# Altium PCB Slot.PcbDoc
Units mil, origin at the board's own origin, x right, y up, seen from the top; angles counter-clockwise.
Board outline 2745 x 3360 mil, 2 copper layers (Top Layer, Bottom Layer); 39 components, 46 nets, 163 pads, 11 vias.
Unrouted connection lines stored in the file: 11.
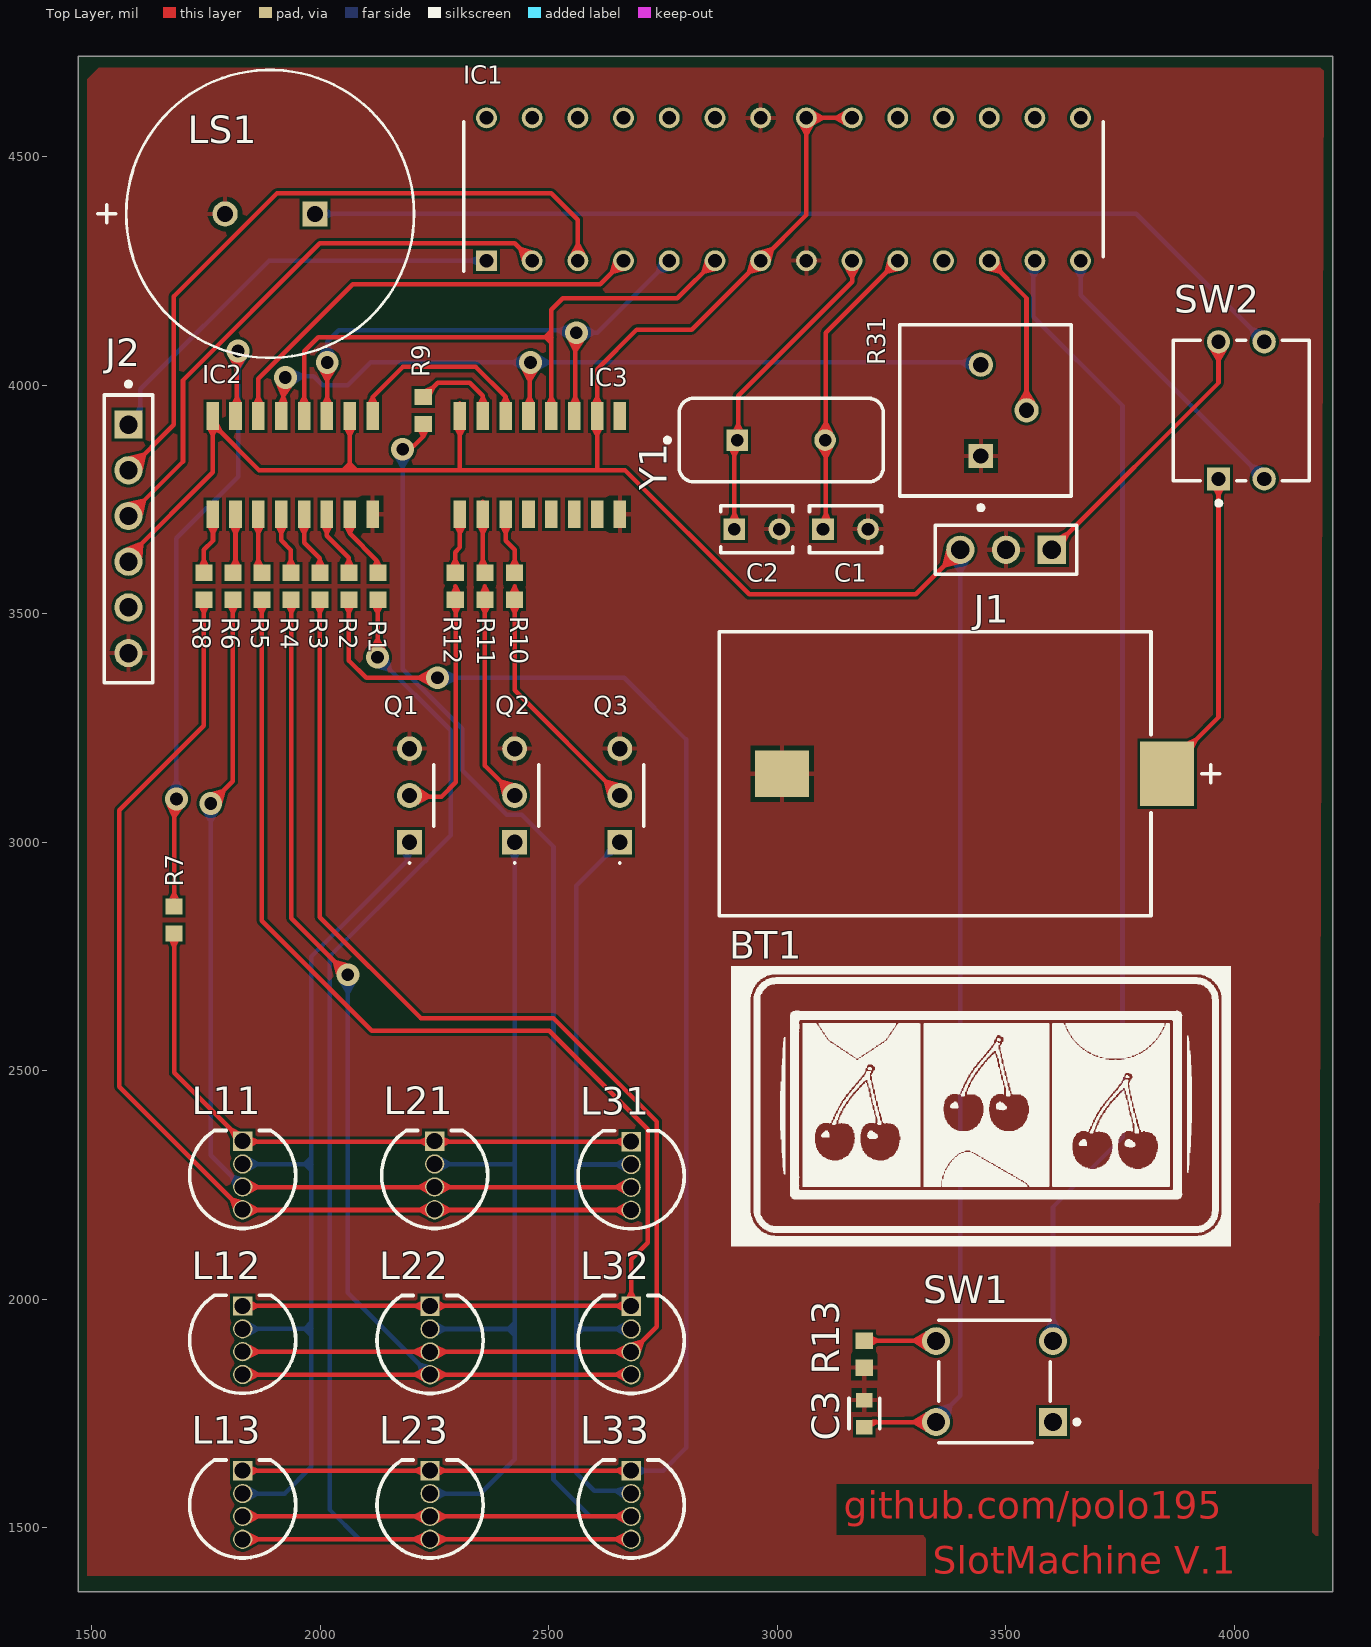
[diagram p0: Top Layer view]
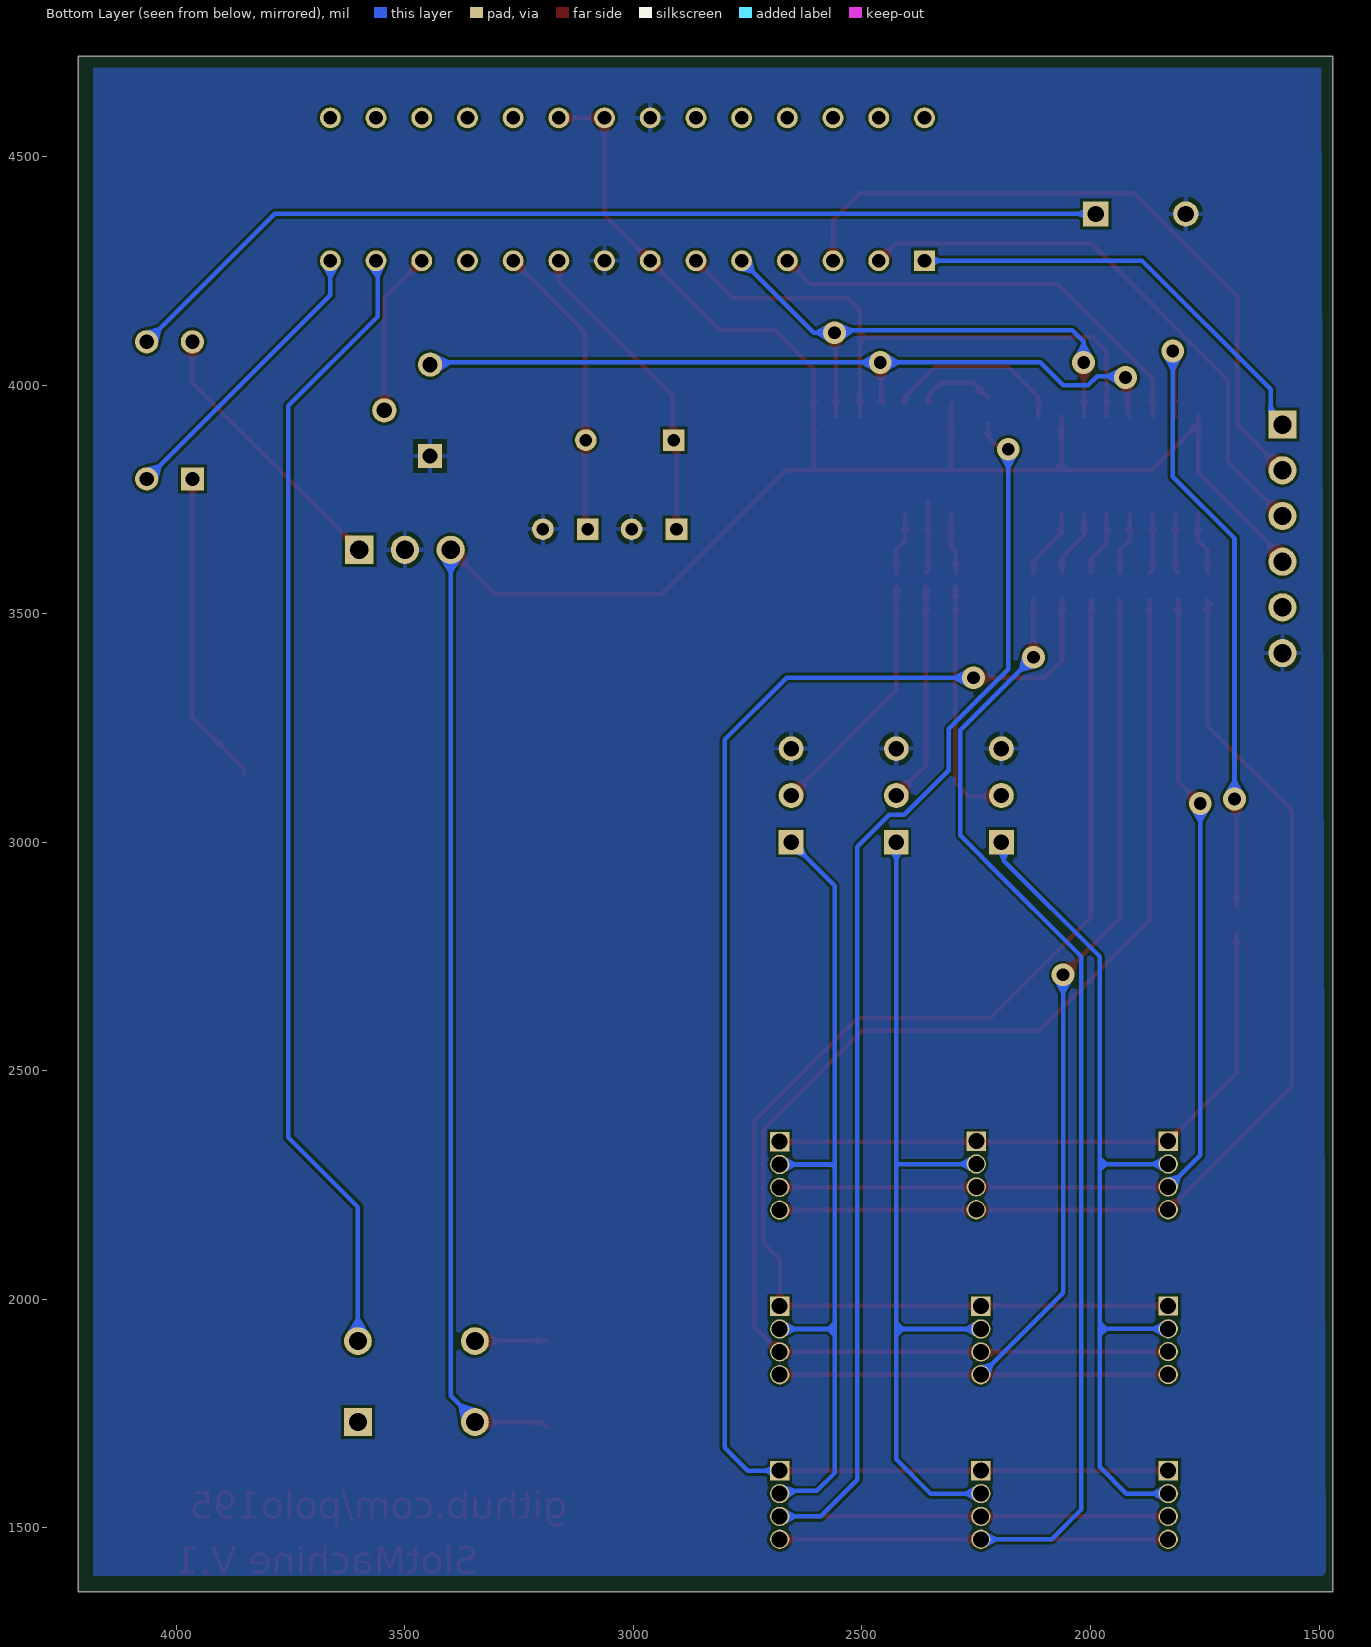
[diagram p1: Bottom Layer view, seen from below]
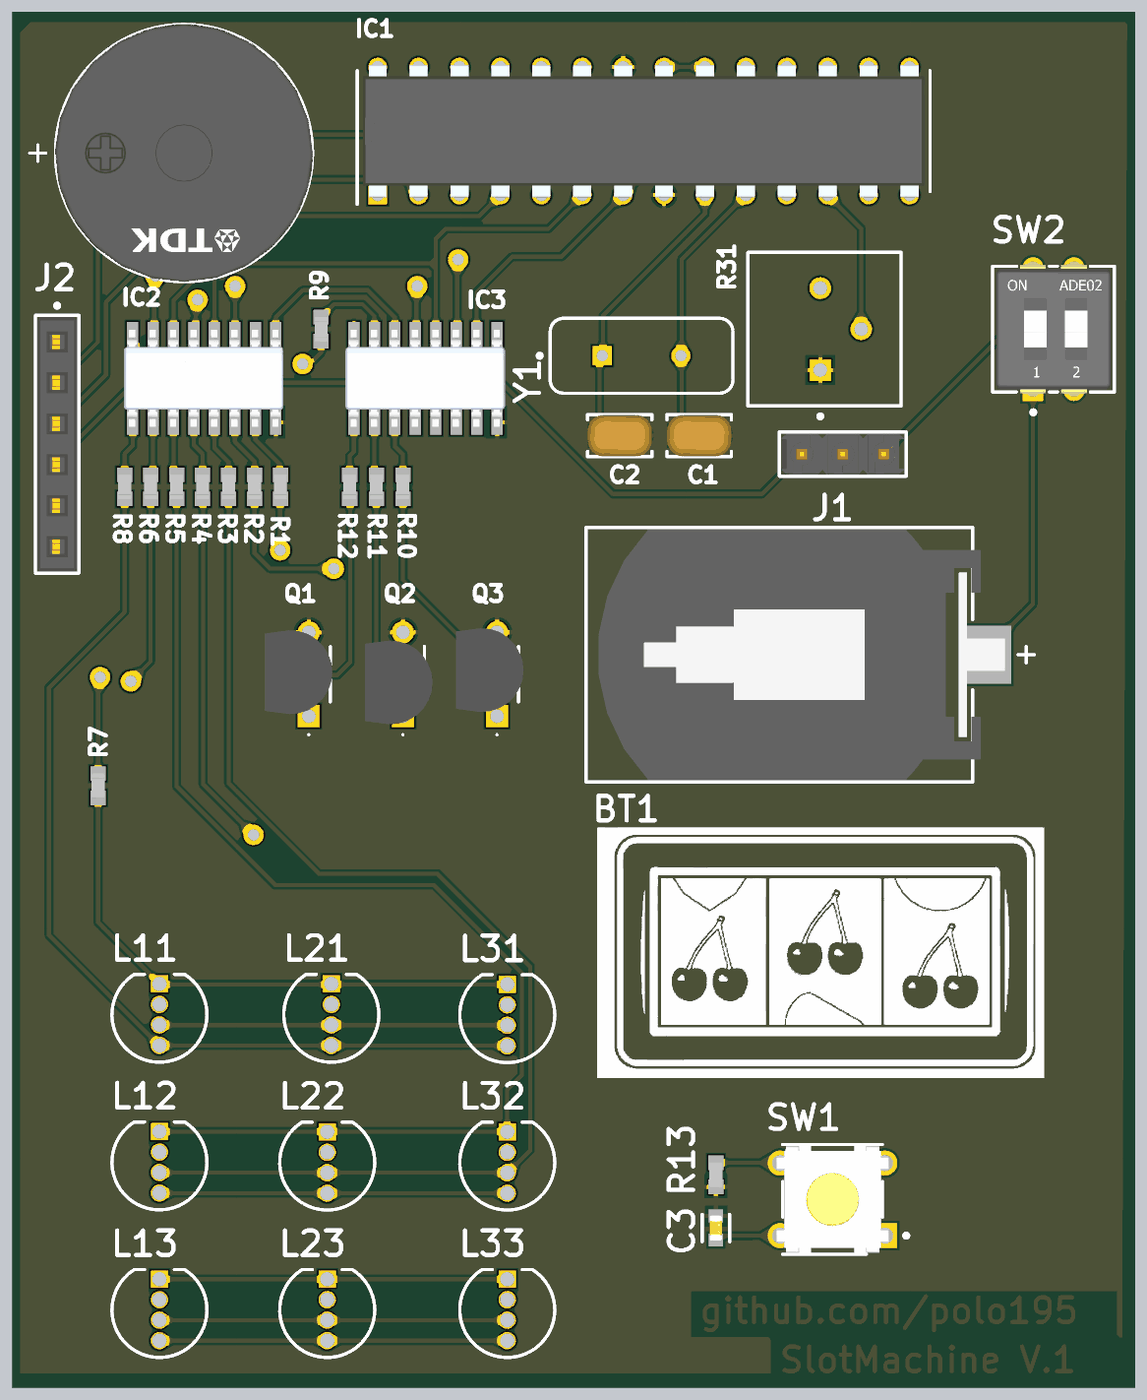
[diagram p2: 3D render of the assembled board from above, using the file's embedded part models]

## Layer stack, top to bottom
Top Solder: solder mask 0.4, Solder Resist, Dk 3.5
Top Layer: signal copper 1.4
Dielectric 1: dielectric 12.6, FR-4, Dk 4.8
Bottom Layer: signal copper 1.4
Bottom Solder: solder mask 0.4, Solder Resist, Dk 3.5

## Board outline
1470,1360 4215,1360 4215,4720 1470,4720

## Design rules (kind name [scope] priority, off if disabled: settings)
Clearance Clearance_1 [All] p1: gap=6 ignorepadtopadclearanceinfootprint=FALSE
PolygonConnect [All] p1: connectstyle=Relief reliefconductorwidth=10 reliefentries=4 polygonreliefangle="90 Angle" airgapwidth=10
RoutingVias [All] p1: holewidth=28 width=50 viastyle="Through Hole" minholewidth=28 minwidth=50 maxholewidth=28 maxwidth=50
SolderMaskExpansion [All] p1: expansion=4 istentingtop=FALSE
SupplyNets "Schematic Supply Nets_2" [InNet('VCC')] p1: voltage=0.000
SupplyNets "Schematic Supply Nets_1" [InNet('GND')] p2: voltage=0.000
SupplyNets "Schematic Supply Nets" [InNet('+5')] p3: voltage=0.000
Width [All] p1: maxlimit=10 minlimit=10 preferedwidth=10
30 further rules are at their usual default settings.

## Components (designator, comment, footprint, x,y, rotation, side; value= is the part's Value field where it differs from the comment)
BT1 "S8421-45R" FP-S8421-45R-MFG 3345,3150 r90 top
C1 "22pF" FP-K221K15X7RF5TL2-MFG 3148.97,3685 r0 top
C2 "22pF" FP-K221K15X7RF5TL2-MFG 2955,3685 r0 top
C3 "CC0603MRX7R7BB224" FP-CC0603-DA-MFG 3190,1750 r90 top value="220 nF"
IC1 "ATMEGA_328PU" DIP794W56P254L3486H508Q28N 3013.28,4428.74 r90 top
IC2 "74HCT595D,118" SOIC127P600X175-16N 1939.25,3825 r90 top
IC3 "74HCT595D,118" SOIC127P600X175-16N 2480.32,3825 r90 top
J1 "22-28-4035" FP-22-28-4035-MFG 3500,3640 r180 top
J2 "2212S-06SG-85" FP-2212S-06SG-85-MFG 1580,3663.93 r270 top
L11 "WP154A4SUREQBFZGC" KING-WP154A4SUREQBFZGC_V 1830,2271 r0 top
L12 "WP154A4SUREQBFZGC" KING-WP154A4SUREQBFZGC_V 1830,1910.5 r0 top
L13 "WP154A4SUREQBFZGC" KING-WP154A4SUREQBFZGC_V 1830,1550 r0 top
L21 "WP154A4SUREQBFZGC" KING-WP154A4SUREQBFZGC_V 2250,2271 r0 top
L22 "WP154A4SUREQBFZGC" KING-WP154A4SUREQBFZGC_V 2240,1910 r0 top
L23 "WP154A4SUREQBFZGC" KING-WP154A4SUREQBFZGC_V 2240,1550 r0 top
L31 "WP154A4SUREQBFZGC" KING-WP154A4SUREQBFZGC_V 2680,2270 r0 top
L32 "WP154A4SUREQBFZGC" KING-WP154A4SUREQBFZGC_V 2680,1910 r0 top
L33 "WP154A4SUREQBFZGC" KING-WP154A4SUREQBFZGC_V 2680,1550 r0 top
LS1 "SD1614T5-A1" FP-SD1614T5-A1-MFG 1890,4375 r180 top
Q1 "BC547BZL1G" BC547BZL1G 2195,3000 r90 top
Q2 "BC547BZL1G" BC547BZL1G 2425,3000 r90 top
Q3 "BC547BZL1G" BC547BZL1G 2655,3000 r90 top
R1 "560" RESC1608X55N 2125.82,3560 r270 top
R2 "560" RESC1608X55N 2062.35,3560 r270 top
R3 "560" RESC1608X55N 1998.88,3560 r270 top
R4 "560" RESC1608X55N 1935.41,3560 r270 top
R5 "560" RESC1608X55N 1871.94,3560 r270 top
R6 "560" RESC1608X55N 1808.47,3560 r270 top
R7 "560" RESC1608X55N 1680,2830 r90 top
R8 "560" RESC1608X55N 1745,3560 r270 top
R9 "560" RESC1608X55N 2225,3945 r90 top
R10 "1k" RESC1608X55N 2425,3560 r270 top
R11 "1k" RESC1608X55N 2360,3560 r270 top
R12 "1k" RESC1608X55N 2295,3560 r270 top
R13 "1k" RESC1608X55N 3190,1880 r270 top
R31 "M63P103KB30T607" VISH-M63P103KB30T607 3455.24,3945 r90 top
SW1 "B3W-1022" FP-B3W-1022-MFG 3475,1820 r0 top
SW2 "1825057-1" FP-1825057-1-MFG 4015,3945 r0 top
Y1 "FOXSLF/160-20" FOX-FOXSLF160-20 3008.22,3880 r0 top

## Footprints (in the part's own frame and the unit in brackets; to place one, negate y for a bottom-side part, rotate by r counter-clockwise, add the part's x,y. Pads: shape width x height; smd on the part's side, far side on the other; paste and mask are expansions set on the pad)
BC547BZL1G [mm]
  rect 1.381x1.381 hole 0.85: 1(0,0)
  round 1.381 hole 0.85: 2(2.6,0) 3(5.2,0)
  silkscreen extent -1.2,-1.34 4.32,0.05, body extent 0.13,-1.46 5.33,2.73, height 8.33
DIP794W56P254L3486H508Q28N [mil]
  rect 45.63x45.63 hole 29.88: 1(-156.26,650)
  round 45.63 hole 29.88: 2(-156.26,550) 3(-156.26,450) 4(-156.26,350) 5(-156.26,250) 6(-156.26,150) 7(-156.26,50) 8(-156.26,-50) 9(-156.26,-150) 10(-156.26,-250) 11(-156.26,-350) 12(-156.26,-450) 13(-156.26,-550) 14(-156.26,-650) 15(156.26,-650) 16(156.26,-550) 17(156.26,-450) 18(156.26,-350) 19(156.26,-250) 20(156.26,-150) 21(156.26,-50) 22(156.26,50) 23(156.26,150) 24(156.26,250) 25(156.26,350) 26(156.26,450) 27(156.26,550) 28(156.26,650)
  silkscreen extent -179,-700 147,700, body extent -162,-686 162,686, height 200
FOX-FOXSLF160-20 [mm] "THD, 2-Leads, Body 11.35x4.65mm"
  rect 1.2x1.2 hole 0.7: 1(-2.44,0)
  round 1.2 hole 0.7: 2(2.44,0)
  silkscreen extent -6.45,-2.32 5.68,2.32, body extent -5.67,-2.32 5.68,2.33, height 3.6
FP-22-28-4035-MFG [mm]
  rect 1.57x1.57 hole 1.02 paste-2539.97 mask+0: 1(-2.54,0)
  round 1.57 hole 1.02 paste-2539.97 mask+0: 2(0,0) 3(2.54,0)
  silkscreen extent -3.94,-1.37 3.94,1.37, body extent -4.04,-1.47 4.04,1.47, height 0.25
FP-2212S-06SG-85-MFG [mm]
  rect 1.57x1.57 hole 1.02 paste-2539.97 mask+0: 1(-6.35,0)
  round 1.57 hole 1.02 paste-2539.97 mask+0: 2(-3.81,0) 3(-1.27,0) 4(1.27,0) 5(3.81,0) 6(6.35,0)
  silkscreen extent -8.72,-1.35 8,1.35, body extent -8.1,-1.45 8.1,1.45, height 0.25
FP-1825057-1-MFG [mm]
  rect 1.29x1.29 hole 0.79 paste-2539.97 mask+0: 1(-1.27,-3.81)
  round 1.29 hole 0.79 paste-2539.97 mask+0: 2(1.27,-3.81) 3(1.27,3.81) 4(-1.27,3.81)
  silkscreen extent -3.78,-5.28 3.78,3.9, body extent -3.88,-4.55 3.88,4.55, height 0.25
FP-B3W-1022-MFG [mm]
  rect 1.55x1.55 hole 1 paste-2539.97 mask+0: 1(3.25,-2.25)
  round 1.55 hole 1 paste-2539.97 mask+0: 2(-3.25,-2.25) 3(3.25,2.25) 4(-3.25,2.25)
  silkscreen extent -3.1,-3.4 4.7,3.4, body extent -4.13,-3.5 4.13,3.5, height 0.25
FP-CC0603-DA-MFG [mm]
  rect 0.8x0.9 smd paste+0 mask+0: 1(-0.75,0) 2(0.75,0)
  silkscreen extent -0.85,-0.85 0.85,0.85, body extent -1.35,-0.75 1.35,0.75, height 0.25
FP-K221K15X7RF5TL2-MFG [mm]
  rect 1.2x1.2 hole 0.7 paste-2539.97 mask+0: 1(-1.25,0)
  round 1.2 hole 0.7 paste-2539.97 mask+0: 2(1.25,0)
  silkscreen extent -2,-1.3 2,1.3, body extent -2.1,-1.4 2.1,1.4, height 0.25
FP-S8421-45R-MFG [mm]
  rect 2.6x3 smd paste+0 mask+0: 1(0,8.5)
  rect 3.6x3 smd paste+0 mask+0: 2(0,-12.9)
  silkscreen extent -7.9,-15.83 7.9,12, body extent -8,-14.5 8,12.09, height 0.25
FP-SD1614T5-A1-MFG [mm]
  rect 1.4x1.4 hole 0.9 paste-2539.97 mask+0: 1(-2.5,0)
  round 1.4 hole 0.9 paste-2539.97 mask+0: 2(2.5,0)
  silkscreen extent -8,-8 9.57,8, body extent -8.1,-8.1 8.1,8.1, height 0.25
KING-WP154A4SUREQBFZGC_V [mm] "THD, 4-Leads, Dia 5.9mm, Pitch 1.27mm"
  rect 1.07x1.07 hole 0.889 paste-2539.97: 1(0,1.905)
  round 1.07 hole 0.889 paste-2539.97: 2(0,0.635) 3(0,-0.635) 4(0,-1.905)
  silkscreen extent -2.95,-2.95 2.95,2.5
RESC1608X55N [mm]
  rect 0.9x0.95 smd: 1(-0.75,0) 2(0.75,0)
  body extent -0.77,-0.4 0.77,0.4, height 0.46
SOIC127P600X175-16N [mm]
  rect 1.55x0.7 smd: 1(-2.725,4.445) 2(-2.725,3.175) 3(-2.725,1.905) 4(-2.725,0.635) 5(-2.725,-0.635) 6(-2.725,-1.905) 7(-2.725,-3.175) 8(-2.725,-4.445) 9(2.725,-4.445) 10(2.725,-3.175) 11(2.725,-1.905) 12(2.725,-0.635) 13(2.725,0.635) 14(2.725,1.905) 15(2.725,3.175) 16(2.725,4.445)
  body extent -3,-4.93 3,4.97, height 1.56
VISH-M63P103KB30T607 [mm] "THD, 3-Leads, Body 9.52x9.52mm, Pitch 2.54mm"
  rect 1.35x1.35 hole 0.85: 1(-2.54,0.26)
  round 1.35 hole 0.85: 2(0,-2.28) 3(2.54,0.26)
  silkscreen extent -5.53,-4.76 4.76,4.76, body extent -4.76,-4.76 4.76,4.76, height 10.91

## Part data
BT1: library part CMP-2000-07028-3, "BATTERY HOLDER COIN 20MM SMD", Case/Package=SMD/SMT, Max Operating Temperature=105°C, Min Operating Temperature=-40°C, Package Quantity=500, Contact Plating=Bronze, Material=Polyphenylene, Mount="Surface Mount", Number of Batteries=1, Number of Cells=1, Packaging="Tape and Reel", REACH SVHC="No SVHC", Termination=SMD/SMT
C1 C2: library part CMP-00030-39474895-1, "K221K15X7RF5TL2 Multilayer Ceramic Capacitor, 220 pF, 50 V, ± 10%, X7R, Radial Leaded", Capacitance=220pF, Case/Package=Dipped, Dielectric=X7R, Dielectric Material=Ceramic, Max Operating Temperature=125°C, Min Operating Temperature=-55°C, Tolerance=10%, Voltage Rating=50V, Depth=2.6mm, Diameter=500µm, Height=4mm, Height - Seated (Max)=5.588mm, Lead Diameter=500µm, Lead Length=30mm, Lead Pitch=2.5mm, Lead/Base Style=Straight, Length=4mm, Mount="Through Hole", NexarPartId=39474895, Number of Pins=2, Packaging="Cut Tape", Radiation Hardening=No, REACH SVHC=Unknown, RoHS=Compliant, Termination=Radial, Thickness=2.6mm, Voltage Rating (DC)=50V, Weight=160.004709mg, Width=2.4892mm
C3: library part CMP-03422-001274-1, "CAP CER 0.22UF 16V X7R 0603", Capacitance="220 nF", Manufacturer=YAGEO, Package=CC0603-DA, Temperature="-55°C to +125°C", Temperature Characteristic=X7R, Temperature Coefficient=15%, Temperature Range High=+125°C, Temperature Range Low=-55°C, Tolerance=0.2, Voltage="16 V", Automotive=No, Category=Cap, ComponentLink2Description=Datasheet, ComponentLink2URL=http://www.yageo.com/documents/recent/UPY-GPHC_X7R_6.3V-to-50V_18.pdf, Device Class L1="Passive Components", Device Class L2=Capacitors, Device Class L3="Ceramic Capacitors", Digikey Description="CAP CER 0.22UF 16V X7R 0603", Footprint Url=http://www.yageo.com/exep/pages/download/literatures/UPY-C_GEN_24.pdf, Height=0.9mm, Lead Free=Yes, Manufacturer Part Number=CC0603MRX7R7BB224, Material=Ceramic, Mouser Description="Multilayer Ceramic Capacitors MLCC - SMD/SMT 220nF 16V X7R 20%", Octopart=https://octopart.com/cc0603mrx7r7bb224-yageo-38999050, RoHS=TRUE, Voltage Rating="16 V"
IC1: "Integrated Circuit", Manufacturer_Name=Microchip, Manufacturer_Part_Number="ATMEGA 328PU", Datasheet Link=https://ww1.microchip.com/downloads/en/DeviceDoc/ATmega48A-PA-88A-PA-168A-PA-328-P-DS-DS40002061B.pdf, Height=5.08mm
IC2 IC3: "Integrated Circuit", Manufacturer_Name=Nexperia, Mouser Part Number=771-74HCT595D-T, Arrow Part Number=74HCT595D,118, Arrow Price/Stock=https://www.arrow.com/en/products/74hct595d118/nexperia?region=europe, Datasheet Link=https://assets.nexperia.com/documents/data-sheet/74HC_HCT595.pdf, Height=1.75mm, Manufacturer_Part_Number=74HCT595D,118, Mouser Price/Stock=https://www.mouser.co.uk/ProductDetail/Nexperia/74HCT595D118?qs=me8TqzrmIYVM2xcL0YiJEg%3D%3D
J1: library part CMP-00257-00247547-1, "22-28-4035 BOARD-BOARD Connector HEADER, 3WAY, 1ROW; Series: KK; Pitch Spacing: 2.54mm; No. of Rows: 1;", Color=Black, Contact Resistance=20mΩ, Current Rating=4A, Manufacturer Lifecycle Status=ACTIVE, Max Operating Temperature=75°C, Max Voltage Rating (DC)=250.25kV, Min Operating Temperature=0°C, Voltage Rating=250V, Connector Type="Male Pin", Contact Material=Brass, Contact Mating Length=7.493mm, Contact Plating=Gold, Country of Origin=US, Gender=Male, Glow Wire Compliant=Non-compliant, Housing Color=Black, Housing Material=Thermoplastic, Lead Free="Lead Free", Lifecycle Status=Production, Mount="Through Hole", NexarPartId=247547, Number of Circuits=3, Number of Contacts=3, Number of Positions=3, Number of Rows=1, Orientation=Vertical, Packaging=Bulk, Pitch=2.54mm, Plating=Tin, REACH SVHC=Unknown, RoHS=Compliant, Schedule B=8536694040, Termination="Through Hole"
J2: library part CMP-12414-000007-1, "Header, Rectangular, 6 Positions, Receptacle, 2.54mm pitch, Vertical, Through-Hole", Flammability Rating="UL94 V-0", Insulation Resistance=1GR, Contact Material=Bronze, Contact Plating=Gold, Gender=Receptacle, Height=0.35inch, Length=0.63inch, Mount="Through Hole", Number of Contacts=6, Number of Rows=1, REACH SVHC="No SVHC", RoHS Compliant=Yes, Termination="Through Hole", Weight=0.11lb, Width=0.12inch
L11 L12 L13 L21 L22 L23 L31 L32 L33: library part CMP-2000-07415-1, "Full Color LED Lamp, Dominant Wavelength RGB 630 / 525 / 465 nm, -40 to 85 degC, 4-Pin THD, RoHS", Color=Red,Green,Blue(RGB), Current - Test=20mA, Manufacturer=Kingbright, Millicandela Rating=1300mcdRed,1700mcdGreen,900mcdBlue, Package / Case=Radial-4Leads, Package Description="4-Pin Through Hole LED, Dia 5.9 mm, Pitch 1.27 mm", Standard Package=500, Voltage - Forward (Vf) (Typ)=1.9VRed,3.3VGreen,3.3VBlue, 3D Model="WP154A4SUREQBFZGW.sldprt /  / WP154A4SUREQBFZGW.pro /  / WP154A4SUREQBFZGW.igs /  / WP154A4SUREQBFZGW.stp", Category=Optoelectronics, Datasheet URL=https://www.kingbrightusa.com/images/catalog/spec/WP154A4SUREQBFZGC.pdf, Datasheet Version="Rev. 5A, 08/2014", Family=LEDIndication-Discrete, Height=8.60mm, Lens Style/Size=RoundwithDomedTop,5mm,T-13/4, Lens Type=Clear, Manufacturer URL=http://www.kingbright.com/, Mounting Technology=ThroughHole, Mounting Type=ThroughHole, Online Catalog=5mm,T-13/4(RGB)RoundwithDomedTopLEDLamp, Other Names="754-1615 / WP154A4SUREQBFZGC-ND", Package Reference=WP154A4SUREQBFZGC, Packaging=Bulk, Viewing Angle=50°, Wavelength - Dominant=630nm,525nm,465nm, Wavelength - Peak=645nm,515nm,460nm
LS1: library part CMP-08413-000005-1, "BUZZER MAGNETIC 5V 80DB 2048HZ 1", Frequency=2.048kHz, Max Operating Temperature=85°C, Min Operating Temperature=-40°C, Operating Supply Current=80mA, Voltage Rating=5V, Mount=Panel, Sensing Method=Magnetic, Termination="PC Pins"
Q1 Q2 Q3: "Transistor BJT NPN", Manufacturer_Name=onsemi, Mouser Part Number=863-BC547BZL1G, Arrow Part Number=BC547BZL1G, Arrow Price/Stock=https://www.arrow.com/en/products/bc547bzl1g/on-semiconductor?region=nac, Datasheet Link=https://www.onsemi.com/download/data-sheet/pdf/BC546-D.PDF, Height=9.33mm, Manufacturer_Part_Number=BC547BZL1G, Mouser Price/Stock=https://www.mouser.com/Search/Refine.aspx?Keyword=863-BC547BZL1G
R1 R2 R3 R4 R5 R6 R7 R8 R9 R10 R11 R12 R13: library part CPF0603B12RE, "Resistor", Manufacturer_Name="TE Connectivity", Datasheet Link=http://www.farnell.com/datasheets/1786775.pdf, Height=0.55mm, Manufacturer_Part_Number=CPF0603B12RE
R31: library part CMP-1666-00012-6, "Single-Turn Cermet Trimmer, 10 KOhm, -55 to 125 degC, 3-Pin THD, RoHS, Bulk", Manufacturer="Vishay Semiconductor", ComponentLink1Description="Manufacturer URL", ComponentLink1URL=http://www.vishay.com/, ComponentLink2Description=Datasheet, ComponentLink2URL=http://120.52.73.14/www.mouser.com/ds/2/427/63-239923.pdf, DatasheetVersion=09/2015, Mounting Technology="Through Hole", PackageDescription="3-Pin Through Hole Device, Body 9.52 x 9.52 mm, Pitch 2.54 mm", PackageReference=M63P103KB30T607
SW1: library part CMP-08834-000055-1, "SWITCH TACTILE SPST-NO 0.05A 24V", Max Operating Temperature=70°C, Min Operating Temperature=-25°C, Operating Force=230gf, Ratings=IP67, Actuator Type=Standard, Illumination Type=Non-Illuminated, Mechanical Life=1000000Cycles, Mount="Through Hole", Packaging=Bulk, RoHS Compliant=Yes, Switch Function=Off-Mom, Switch Travel=0.25mm, Termination="PC Pin", Throw Configuration=SPST
SW2: library part CMP-03400-000012-1, "SWITCH SLIDE DIP SPST 100MA 24V", Contact Current Rating=100mA, Contact Resistance=50mΩ, Manufacturer="TE Connectivity", Temperature="-30°C to +85°C", Temperature Range High=+85°C, Temperature Range Low=-30°C, Voltage Rating Dc=24V, Automotive=No, Category=Switch, ComponentLink2Description=Datasheet, ComponentLink2URL=https://www.te.com/commerce/DocumentDelivery/DDEController?Action=srchrtrv&DocNm=1825057&DocType=Customer+Drawing&DocLang=English, Device Class L1=Electromechanical, Device Class L2=Switches, Device Class L3="DIP Switches", Digikey Description="SWITCH SLIDE DIP SPST 100MA 24V", Electromechanical Life=1000Cycles, Height=6.15mm, Lead Free=Yes, Manufacturer Part Number=1825057-1, Mount="Through Hole", Number of Circuits=2, Octopart=https://octopart.com/1825057-1-te+connectivity-46507313, Package=1825057-1, RoHS=TRUE, Standoff Height=1.3mm, Throw Configuration=SPST
Y1: library part CMP-1749-00003-1, "Resistance Weld Thru-Hole Crystal, 16 MHz, -20 to 70 degC, 2-Pin THD, RoHS, Bulk", Case\Package=Axial, Max Operating Temperature="155 degC", Min Operating Temperature="-55 degC", Package Quantity=200, Power Rating="250 mW", Resistance="221 kohm", Tolerance=1%, Voltage Rating="250 V", ComponentLink1Description="Manufacturer URL", ComponentLink1URL=http://www.foxonline.com/, ComponentLink2Description=Datasheet, ComponentLink2URL=http://www.foxonline.com/pdfs/hc49slf.pdf, DatasheetVersion=Mar-15, Length="0.248 inch", Mount="Through Hole", PackageDescription="2-Pin Through Hole Device, Body 11.35 x 4.65 mm", PackageReference=FOXSLF160-20, Packaging=Bulk, RoHSCompliant=true

## Via types
v1: diameter 50, hole 28, Top Layer to Bottom Layer, 11 vias

## Nets (pads, with @x,y where several pads share a name; then routed paths per layer and width w, separated by ;. In a path a pad name is that pad's centre, name@x,y a point inside that pad or via, vN(x,y) a via of type N, cw(c..) or ccw(c..) an arc to the next point about the centre after c; other vN are vias at no path point)
+5: C3.1 IC1.7 IC1.20 IC1.21 IC2.10 IC2.16 IC3.10 IC3.16 J1.3 J2.4 SW1.2 | length 5707.7
  Top Layer w10: J2.4 1580,3625 1764.25,3809.25 IC2.16@1764.25,3915 ; IC2.16 1764.25,3915.55 1865.66,3814.14 2064.25,3814.14 ; IC2.10 2064.25,3814.14 ; IC3.16@2305.32,3960 IC3.16 2305.32,3815.32 2304.14,3814.14 ; IC1.20 IC1.21 3063.28,4372.48 IC1.7 2812.53,4121.73 2691.73,4121.73 2605.32,4035.32 IC3.10 2605.32,3814.47 2605,3814.14 ; C3.1 3200.75,1731.22 3278.39,1731.22 3278.58,1731.42 SW1.2 ; J1.3 3302.62,3542.62 2938.03,3542.62 2666.51,3814.14 2605,3814.14 ; 2064.25,3814.14 2304.14,3814.14 ; 2304.14,3814.14 2605,3814.14
  Bottom Layer w10: SW1.2@3347.05,1736.42 3400,1789.37 J1.3
GND: BT1.1 C1.2 C2.2 C3.2 IC1.8 IC1.22 IC2.8 IC3.8 J1.2 J2.6 LS1.2 Q1.3 Q2.3 Q3.3 R13.2 R31.1
NetC1_1: C1.1 IC1.10 Y1.2 | length 656.7
  Top Layer w10: C1.1 3106.06,3691.31 3106.06,3878.22 Y1.2 3106.06,3881.78 3106.06,4115.27 IC1.10
NetC2_1: C2.1 IC1.9 Y1.1 | length 694.1
  Top Layer w10: C2.1 2905.79,3873.63 2913.94,3881.78 2913.94,3977.2 3163.28,4226.54 IC1.9
NetIC1_1: IC1.1 J2.1 | length 961.7
  Bottom Layer w10: J2.1 1605.91,3939.83 1605.91,3990.91 1887.48,4272.48 IC1.1
NetIC1_2: IC1.2 J2.3 | length 1250
  Top Layer w10: J2.3 1699.29,3833.21 1699.29,4010.85 1998.73,4310.3 2425.46,4310.3 IC1.2
NetIC1_3: IC1.3 J2.2 | length 1512.4
  Top Layer w10: J2.2 1679.29,3913.21 1679.29,4194.28 1905,4420 2505,4420 2563.28,4361.72 IC1.3
NetIC1_4: IC1.4 IC2.14 | length 988
  Top Layer w10: IC2.14 1864.25,4014.25 2071.12,4221.12 2611.91,4221.12 IC1.4
NetIC1_5: IC1.5 IC2.11 IC3.11 | length 1173.6
  Top Layer w10: IC2.11 2014.63,3932.66 2014.63,4049.63 v1(2015,4050) ; IC3.11 2557.66,3934.62 2557.66,4112.66 v1(2560,4115)
  Bottom Layer w10: v1(2015,4050) 2015,4095 2040,4120 2555,4120 v1(2560,4115) 2605.8,4115 IC1.5
NetIC1_6: IC1.6 IC2.12 IC3.12 | length 1331.3
  Top Layer w10: IC2.12 1964.25,4074.25 1995.33,4105.32 2505.32,4105.32 ; IC3.12 2505.32,4105.32 ; IC1.6 2780.8,4190 2530,4190 2505.32,4165.32 2505.32,4105.32
NetIC1_12: IC1.12 R31.2 | length 361.3
  Top Layer w10: IC1.12 3545,4190.76 R31.2
NetIC1_13: IC1.13 SW1.3 | length 2509
  Bottom Layer w10: IC1.13 3560,4269.2 3560,4150 3755,3955 3755,2353.96 3602.95,2201.92 SW1.3
NetIC1_14: IC1.14 SW2.2 | length 643.9
  Bottom Layer w10: IC1.14 3663.28,4196.72 SW2.2
NetIC2_1: IC2.1 R8.1 | length 136.8
  Top Layer w10: R8.1 1745,3640 1765,3660 1765,3716.97 IC2.1
NetIC2_2: IC2.2 R6.1 | length 130.6
  Top Layer w10: R6.1 1814.25,3595.31 IC2.2
NetIC2_3: IC2.3 R5.1 | length 131.4
  Top Layer w10: IC2.3 1864.25,3597.22 R5.1
NetIC2_4: IC2.4 R4.1 | length 137
  Top Layer w10: IC2.4 1914.25,3660.75 1935.41,3639.59 R4.1
NetIC2_5: IC2.5 R3.1 | length 142.5
  Top Layer w10: IC2.5 1964.25,3655.75 1998.88,3621.12 R3.1
NetIC2_6: IC2.6 R2.1 | length 148.1
  Top Layer w10: IC2.6 2014.25,3670.75 2062.35,3622.65 R2.1
NetIC2_7: IC2.7 R1.1 | length 153.7
  Top Layer w10: IC2.7 2064.25,3675.75 2123.61,3616.39 2123.61,3591.74 R1.1
NetIC2_9: IC2.9 IC3.14 | length 402
  Top Layer w10: IC2.9 2114.25,3974.25 2180,4040 2340,4040 2405.32,3974.68 IC3.14@2405.32,3960
NetIC2_13: IC2.13 IC3.13 R31.3 | length 1734.3
  Top Layer w10: IC2.13 1918.77,3936.8 1918.77,4012.2 v1(1923.28,4016.72) ; IC3.13@2455.32,3960 2457.66,3962.34 2457.66,4047.66 v1(2460,4050)
  Bottom Layer w10: v1(1923.28,4016.72) 1926.57,4020 1985.41,4020 2005.41,4000 2060,4000 2110,4050 v1(2460,4050) 3440,4050 R31.3
NetIC2_15: IC2.15 R7.2 | length 1418.6
  Top Layer w10: R7.2 1680,3090 v1(1685,3095) ; IC2.15 1817.13,3935.16 1817.13,4072.13 v1(1820,4075)
  Bottom Layer w10: v1(1685,3095) 1685,3665 1820,3800 v1(1820,4075)
NetIC3_1: IC3.1 R12.1 | length 132.5
  Top Layer w10: R12.1 2295,3635 2305.32,3645.32 IC3.1
NetIC3_2: IC3.2 R11.1 | length 157.8
  Top Layer w10: IC3.2@2355.32,3745.43 2355.32,3594.2 R11.1
NetIC3_3: IC3.3 R10.1 | length 136.3
  Top Layer w10: IC3.3 2405.32,3659.68 2425,3640 R10.1
NetIC3_15: IC3.15 R9.2 | length 171.8
  Top Layer w10: R9.2 2225.98,3974.53 2256.97,4005.51 2326.55,4005.51 2355.32,3976.73 IC3.15@2355.32,3960
NetJ1_1: J1.1 SW2.4 | length 606.2
  Top Layer w10: J1.1 3965,4005 SW2.4
NetL11_1: L11.1 L21.1 L31.1 R7.1 | length 1367
  Top Layer w10: R7.1 1680,2496 L11.1 1831,2345 L31.1
NetL11_2: L11.2 L12.2 L13.2 Q1.1 | length 1929.8
  Bottom Layer w10: L13.2 1921.53,1575 1980,1633.47 1980,1935.5 ; L12.2 1980,1935.5 ; L11.2 1980,2296 ; Q1.1 2190,2995 2190,2960 1980,2750 1980,2296 ; 1980,1935.5 1980,2296
NetL11_3: L11.3 L21.3 L31.3 R6.2 | length 2184.5
  Top Layer w10: v1(1760,3085) 1808.47,3133.47 R6.2 ; L11.3 1830.5,2245.5 2679.5,2245.5 L31.3
  Bottom Layer w10: v1(1760,3085) 1760,2315 1829,2246 L11.3
NetL11_4: L11.4 L21.4 L31.4 R8.2 | length 2388.1
  Top Layer w10: R8.2@1735,3520.47 R8.2 1745,3255 1560,3070 1560,2465 1829,2196 L11.4 1830.5,2195.5 2679.5,2195.5 L31.4
NetL12_1: L12.1 L22.1 L32.1 R5.2 | length 2987.7
  Top Layer w10: L12.1 2679.5,1985.5 L32.1 2680,2087.47 2716.06,2123.53 2716.06,2372.28 2500.67,2587.67 2112.33,2587.67 1871.94,2828.06 R5.2
NetL12_3: L12.3 L22.3 L32.3 R3.2 | length 2994.7
  Top Layer w10: L12.3 1830.25,1885.25 2679.75,1885.25 L32.3 2681,1885 2736.06,1940.06 2736.06,2388.94 2510,2615 2220,2615 1998.88,2836.12 R3.2
NetL12_4: L12.4 L22.4 L32.4 R4.2 | length 2672
  Top Layer w10: L12.4 1830.25,1835.25 2679.75,1835.25 L32.4 ; R4.2@1936.4,3530.47 1936.4,2833.6 v1(2060,2710)
  Bottom Layer w10: v1(2060,2710) 2060,2014 2239,1835 L22.4
NetL13_1: L13.1 L23.1 L33.1 R2.2 | length 3482.7
  Top Layer w10: L13.1 L23.1 L33.1 ; R2.2 2062.35,3397.65 2100,3360 v1(2256.3,3360)
  Bottom Layer w10: v1(2256.3,3360) 2665,3360 2800,3225 2800,1675 2750,1625 L33.1
NetL13_3: L13.3 L23.3 L33.3 R9.1 | length 3548.2
  Top Layer w10: L13.3 L23.3 L33.3 ; v1(2180,3860) 2187.65,3867.65 2204.74,3867.65 2225,3887.91 R9.1
  Bottom Layer w10: v1(2180,3860) 2180,3378.28 2310,3248.28 2310,3157.7 2407.53,3060.18 2440.41,3060.18 2510,2990.58 2510,1605 2590,1525 L33.3
NetL13_4: L13.4 L23.4 L33.4 R1.2 | length 3264.1
  Top Layer w10: L13.4 L23.4 L33.4 ; v1(2125,3405) 2125,3529.65 R1.2
  Bottom Layer w10: v1(2125,3405) 2285,3245 2285,3015 2237.19,2967.19 2237.19,2966.6 2228.4,2957.81 2227.81,2957.81 2020,2750 2020,1540 2085,1475 L23.4
NetL21_2: L21.2 L22.2 L23.2 Q2.1 | length 1927.7
  Bottom Layer w10: L23.2 2350,1575 2425,1650 2425,1935 ; L22.2 2425,1935 ; L21.2 2421,2296 2425,2300 ; Q2.1 2425,2300 ; 2425,1935 2425,2296 2425,2300
NetL31_2: L31.2 L32.2 L33.2 Q3.1 | length 1801
  Bottom Layer w10: Q3.1 2559.92,2904.92 2559.92,2288.26 ; L33.2 2673.85,1581.15 2598.85,1581.15 2559.92,1620.08 2559.92,1935 ; L32.2 2559.92,1935 ; L31.2 2566.66,2295 2559.92,2288.26 ; 2559.92,1935 2559.92,2288.26
NetLS1_1: LS1.1 SW2.3 | length 2192.6
  Bottom Layer w10: LS1.1 3785,4375 SW2.3
NetQ1_2: Q1.2 R12.2 | length 545
  Top Layer w10: Q1.2 2197.36,3100 2265,3100 2296.3,3131.3 2296.3,3559.17 2295,3560.47
NetQ2_2: Q2.2 R11.2 | length 485
  Top Layer w10: 2360,3560.47 2360,3167.36 Q2.2
NetQ3_2: Q3.2 R10.2 | length 553.4
  Top Layer w10: 2425,3560.47 2425,3332.36 Q3.2
NetR13_1: R13.1 SW1.4 | length 157.4
  Top Layer w10: R13.1 3346.1,1909.53 SW1.4
VCC: BT1.2 SW2.1 | length 691.4
  Top Layer w10: BT1.2 3852.87,3161.81 3965,3273.94 SW2.1
pads on no net: IC1.11 IC1.15 IC1.16 IC1.17 IC1.18 IC1.19 IC1.23 IC1.24 IC1.25 IC1.26 IC1.27 IC1.28 IC3.4 IC3.5 IC3.6 IC3.7 IC3.9 J2.5 SW1.1

## Polygon pours and split planes (outlines as drawn)
GND on Bottom Layer "GND_L02_P000" (solid, pour order 0): 1494.92,4695 4182.5,4695 4182.5,1395 1485.08,1395
GND on Top Layer "GND_L01_P001" (solid, remove dead copper, pour order 1): 4195,4695 1515,4695 1490,4670 1490,1395 4182.5,1395

## Other copper
Top Layer:
  text "github.com/polo195" at 3145,1519.99 h60
  text "SlotMachine V.1" at 3340,1400 h60

## Silkscreen, mask and mechanical layers (free items; w line width, h text height)
Top Overlay:
  drawing of 23 lines, arcs and shapes, not listed
Mechanical 1:
  lines w10: 1470.02,1362.08 4215,1362.08 4215,4720 1470.02,4720 1470.02,1362.08